# Altium PCB Quad FC V10.5.5.PcbDoc
Units mil, origin at the board's own origin, x right, y up, seen from the top; angles counter-clockwise.
Board outline 1771.65 x 1614.17 mil, 2 copper layers (Top Layer, Bottom Layer); 67 components, 51 nets, 286 pads, 114 vias.
Unrouted connection lines stored in the file: 67.
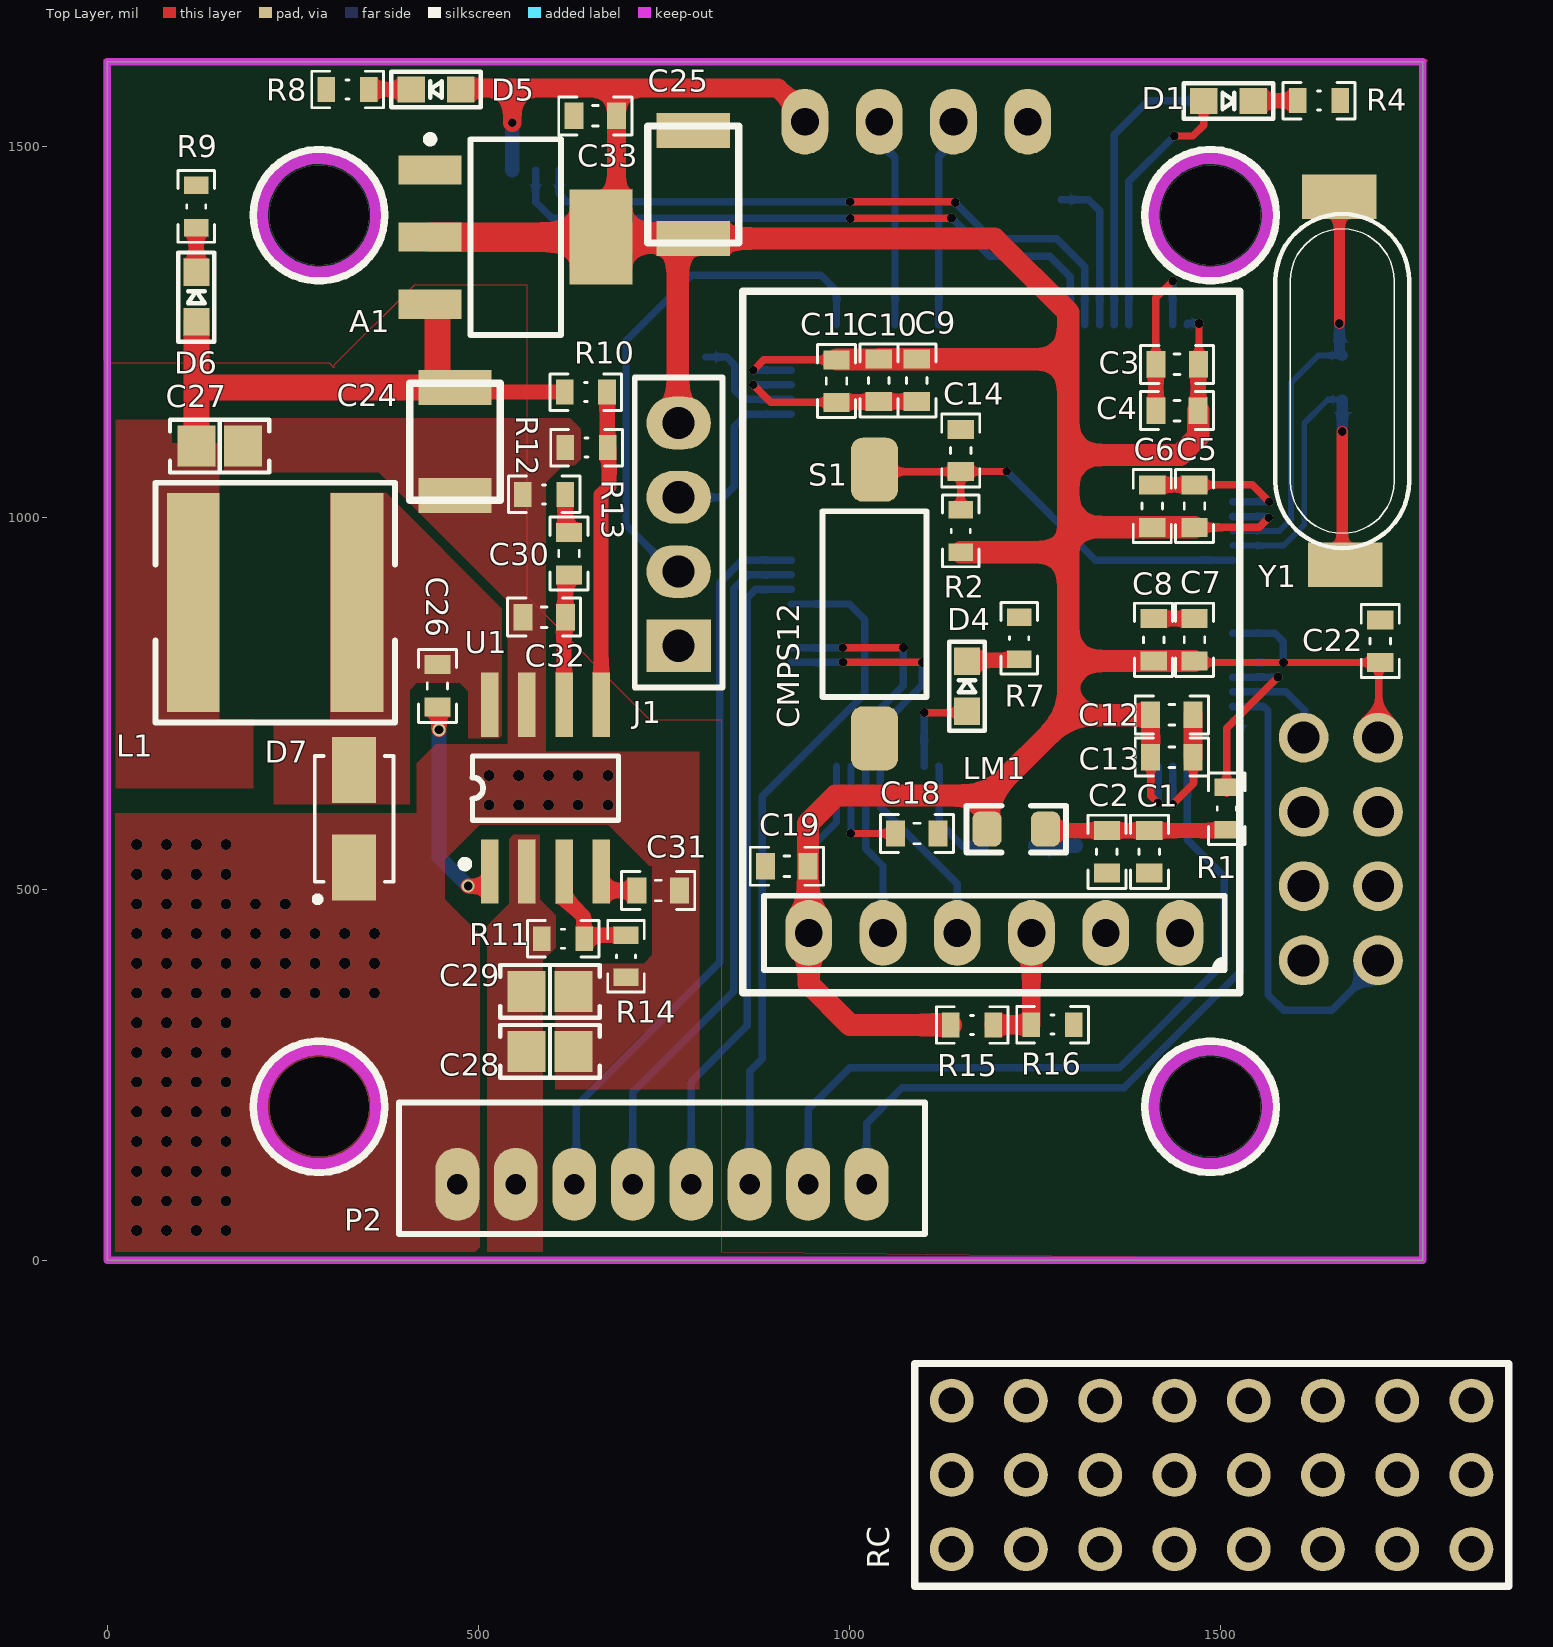
[diagram p0: Top Layer view]
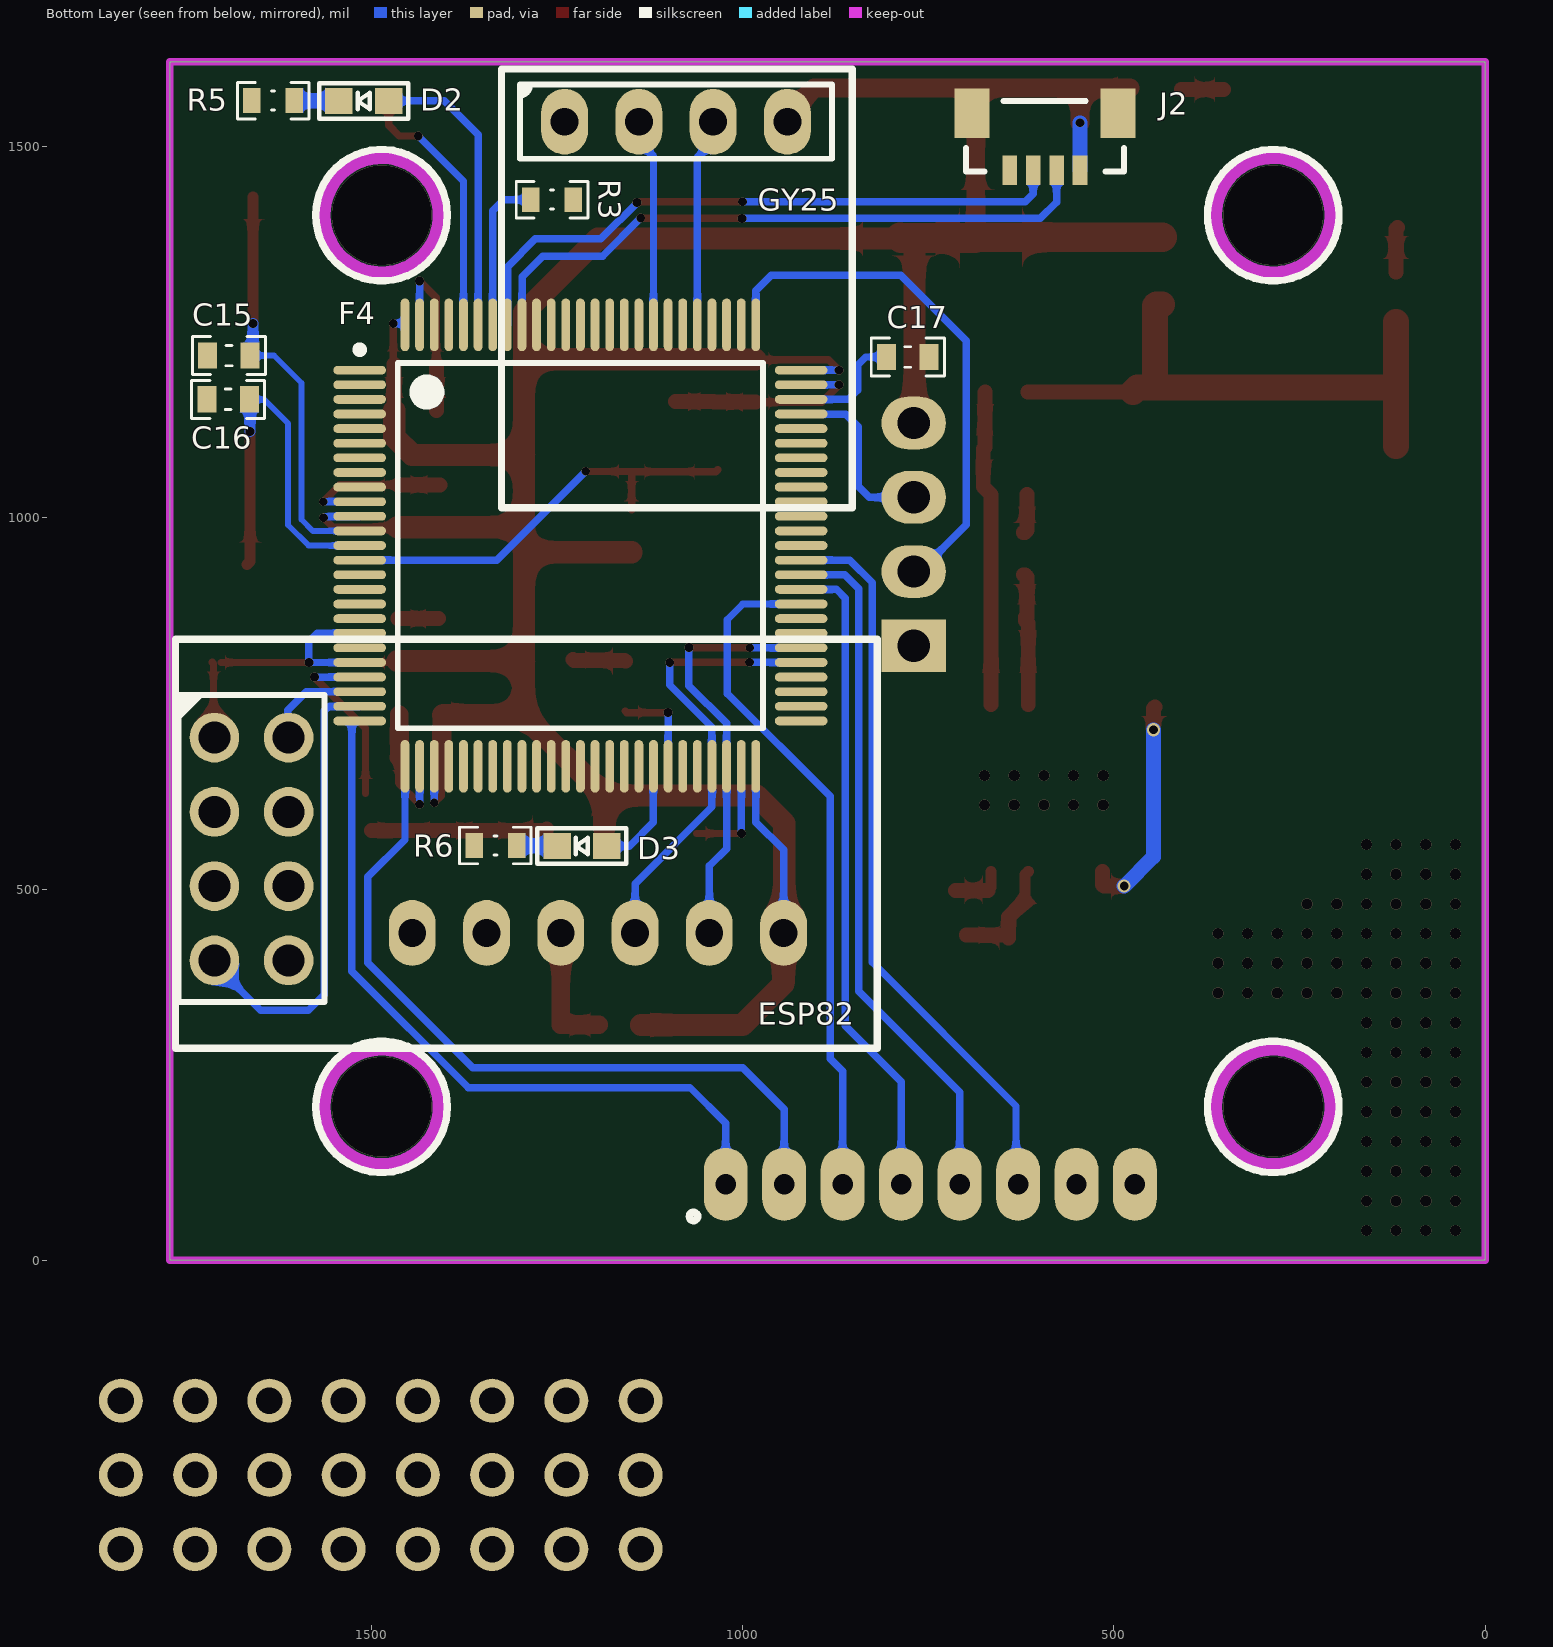
[diagram p1: Bottom Layer view, seen from below]
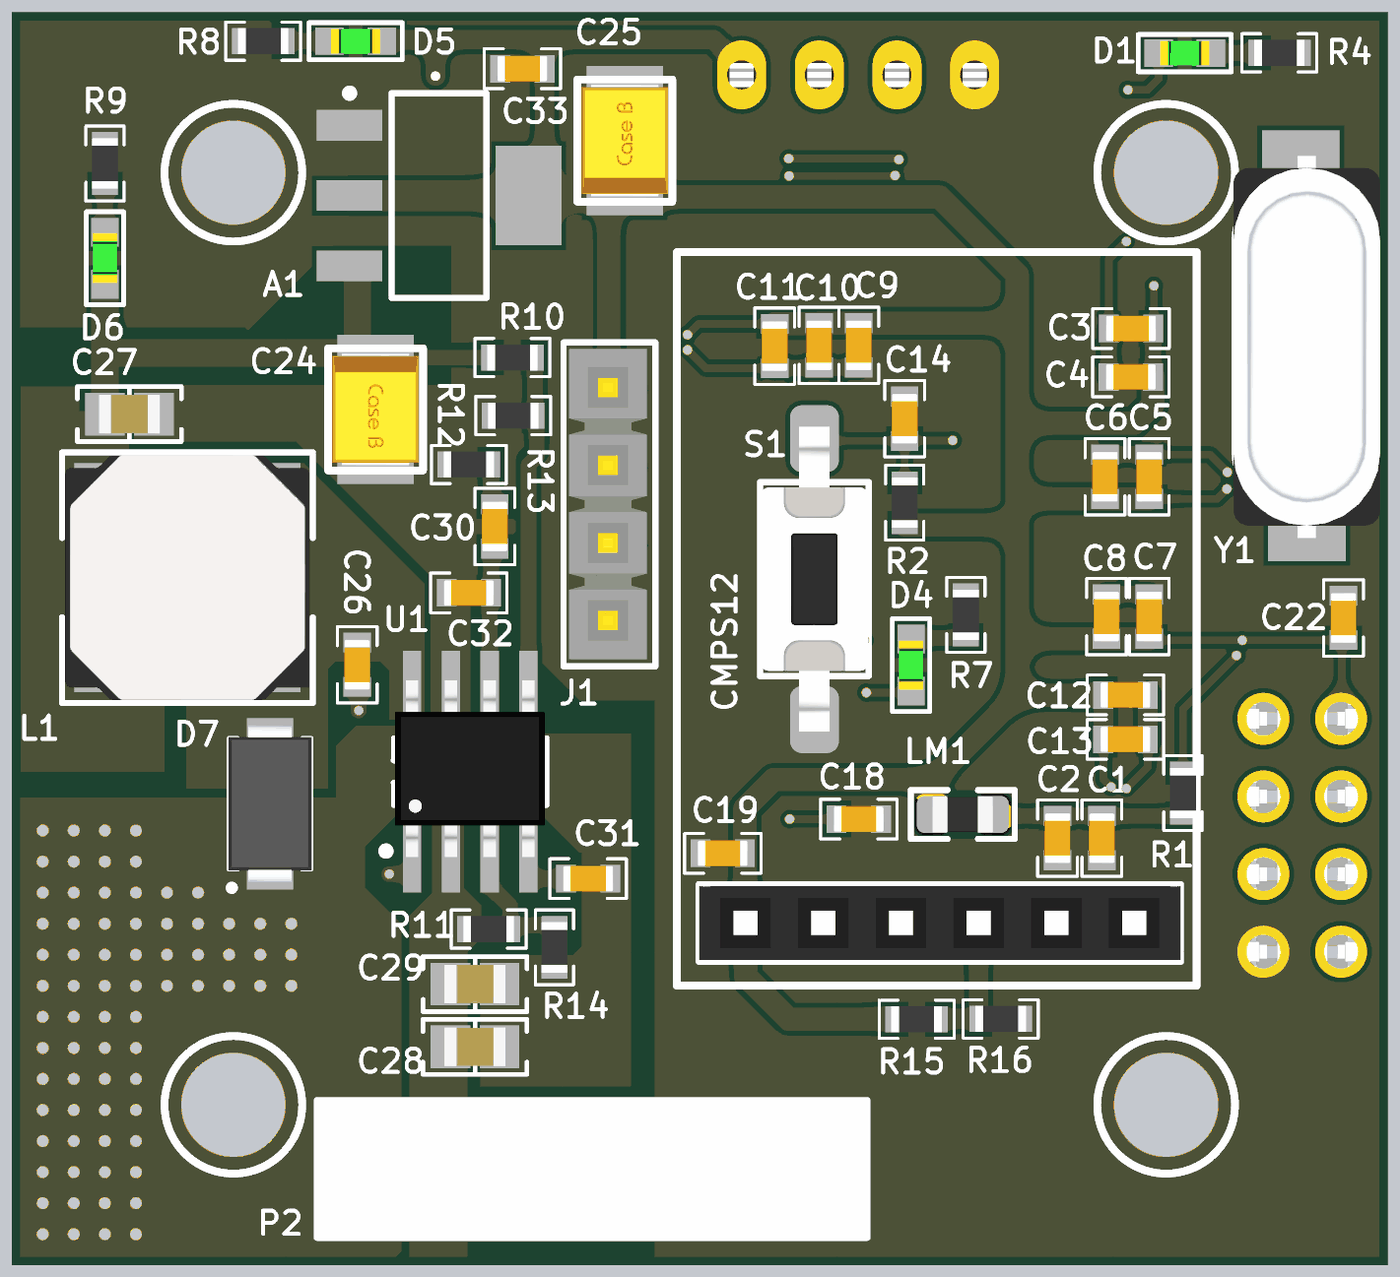
[diagram p2: 3D render of the assembled board from above, using the file's embedded part models]
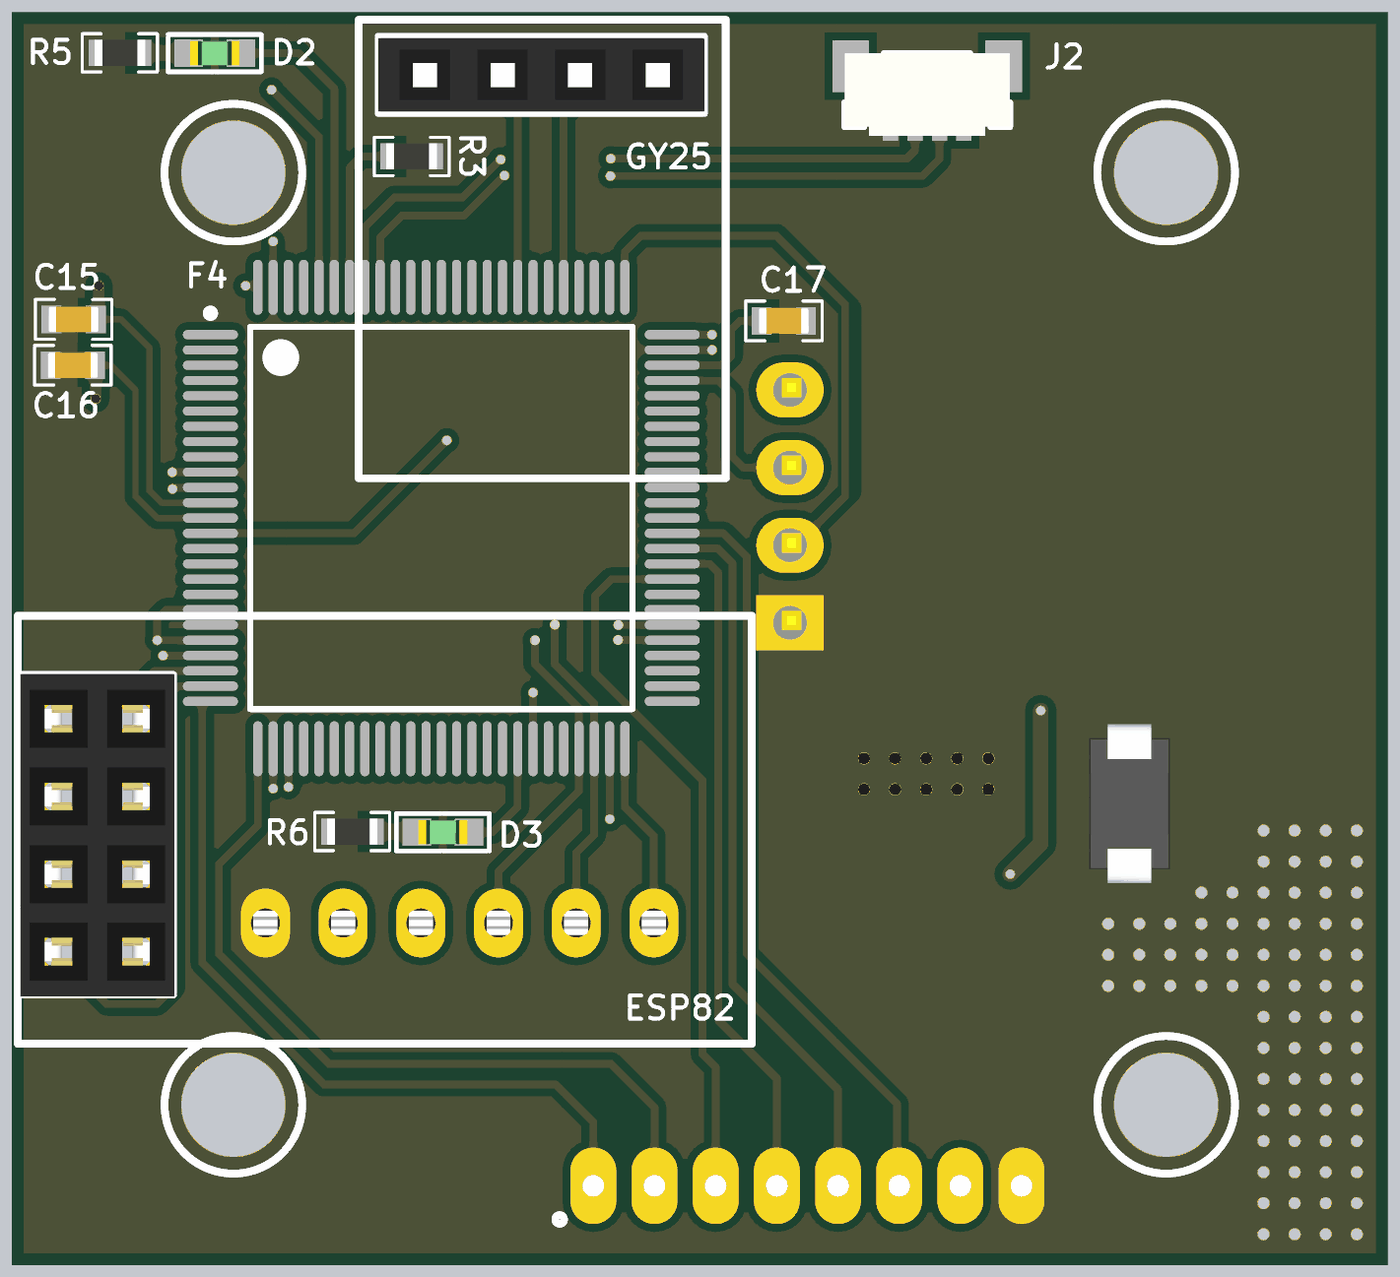
[diagram p3: 3D render of the assembled board from below, using the file's embedded part models]

## Layer stack, top to bottom
Top Solder: solder mask 0.4, Solder Resist, Dk 3.5
Top Layer: signal copper 1.4
Dielectric 1: dielectric 12.6, FR-4, Dk 4.8
Bottom Layer: signal copper 1.4
Bottom Solder: solder mask 0.4, Solder Resist, Dk 3.5

## Board outline
0,0 0,1614.17 1771.65,1614.17 1771.65,0

## Design rules (kind name [scope] priority, off if disabled: settings)
Clearance Clearance_2 [InNamedPolygon('NONET_L02_P005')] p1: gap=10 ignorepadtopadclearanceinfootprint=FALSE except(0: Arc-Hole Track-Hole SMDPad-Hole THPad-Hole Via-Hole Fill-Hole Poly-Hole Region-Hole Text-Hole)
Clearance Clearance_1 [InNamedPolygon('NONET_L02_P005')] p2: gap=20 ignorepadtopadclearanceinfootprint=FALSE except(0: Arc-Hole Track-Hole SMDPad-Hole THPad-Hole Via-Hole Fill-Hole Poly-Hole Region-Hole Text-Hole)
Clearance [All] p3: gap=6 ignorepadtopadclearanceinfootprint=FALSE except(0: Arc-Hole Track-Hole SMDPad-Hole THPad-Hole Via-Hole Fill-Hole Poly-Hole Region-Hole Text-Hole)
DiffPairsRouting [All] p1: maxlimit=10 minlimit=8 mostfreqgap=10 toplayer_minwidth=8 toplayer_maxwidth=15 toplayer_prefwidth=15 bottomlayer_minwidth=8 bottomlayer_maxwidth=15 bottomlayer_prefwidth=15 maxuncoupledlength=500
PolygonConnect PolygonConnect_8 [All vs IsNamedPolygon('NONET_L02_P005')] p1: connectstyle=Direct reliefconductorwidth=10 reliefentries=4 polygonreliefangle="90 Angle" airgapwidth=10
PolygonConnect PolygonConnect_7 [All vs IsNamedPolygon('NONET_L01_P004')] p2: connectstyle=Direct reliefconductorwidth=10 reliefentries=4 polygonreliefangle="90 Angle" airgapwidth=10
PolygonConnect PolygonConnect_6 [All vs IsNamedPolygon('NONET_L01_P004')] p3: connectstyle=Relief reliefconductorwidth=10 reliefentries=4 polygonreliefangle="90 Angle" airgapwidth=10
PolygonConnect PolygonConnect_5 [All vs IsNamedPolygon('NONET_L01_P004')] p4: connectstyle=Direct reliefconductorwidth=10 reliefentries=4 polygonreliefangle="90 Angle" airgapwidth=10
PolygonConnect PolygonConnect_4 [All vs IsNamedPolygon('12V_L01_P003')] p5: connectstyle=Direct reliefconductorwidth=10 reliefentries=4 polygonreliefangle="90 Angle" airgapwidth=10
PolygonConnect PolygonConnect_3 [All vs IsNamedPolygon('GND_L01_P002')] p6: connectstyle=Direct reliefconductorwidth=10 reliefentries=4 polygonreliefangle="90 Angle" airgapwidth=10
PolygonConnect PolygonConnect_2 [All vs IsNamedPolygon('NETC26_1_L01_P001')] p7: connectstyle=Direct reliefconductorwidth=10 reliefentries=4 polygonreliefangle="90 Angle" airgapwidth=10
PolygonConnect PolygonConnect_1 [All vs IsNamedPolygon('VBAT+_L01_P000')] p8: connectstyle=Direct reliefconductorwidth=10 reliefentries=4 polygonreliefangle="90 Angle" airgapwidth=10
PolygonConnect [All] p9: connectstyle=Relief reliefconductorwidth=10 reliefentries=4 polygonreliefangle="90 Angle" airgapwidth=10
RoutingVias [All] p1: holewidth=11.81 width=17.72 viastyle="Through Hole" minholewidth=11.81 minwidth=7.87 maxholewidth=196.85 maxwidth=196.85
SilkToSilkClearance [All] p1: silktosilkclearance=6
SolderMaskExpansion [Isvia] p1: expansion=2 istentingtop=TRUE
Width GND [All] p1: maxlimit=40 minlimit=10 preferedwidth=20
Width 3.3V [InNet('3V3')] p2: maxlimit=40 minlimit=10 preferedwidth=20
Width 12V [InNet('12V')] p3: maxlimit=40 minlimit=10 preferedwidth=20
Width [All] p4: maxlimit=20 minlimit=10 preferedwidth=15 minimp=50.000000 maximp=50.000000 favimp=50.000000
28 further rules are at their usual default settings.

## Classes and differential pairs
component class "Quad FC V10.5": C1 C2 C3 C4 C5 C6 C7 C8 C9 C10 C11 C12 C13 C14 C15 C16 C17 C18 C19 C22 C33 CMPS12 D1 D2 D3 D4 ESP82 F4 GY25 J1 J2 LM1 R1 R2 R3 R4 R5 R6 R7 R15 R16 RC S1 Y1
component class "Quad FC power V10.5": A1 C24 C25 C26 C27 C28 C29 C30 C31 C32 D5 D6 D7 L1 P2 R8 R9 R10 R11 R12 R13 R14 U1
differential pair F407_OSC: +F407_OSC_P -F407_OSC_N

## Components (designator, comment, footprint, x,y, rotation, side; value= is the part's Value field where it differs from the comment)
A1 "3.3V linear regulator" SOT230P700X180-4N 550.2,1377.95 r0 top
C1 "100nF" CAP0603 1403.54,550.2 r90 top
C2 "1uF" CAP0603 1346.46,550.2 r90 top
C3 "100nF" CAP0603 1440.94,1206.69 r0 top
C4 "100nF" CAP0603 1440.79,1144.33 r0 top
C5 "100nF" CAP0603 1464.41,1015.75 r270 top
C6 "100nF" CAP0603 1407.48,1015.75 r270 top
C7 "100nF" CAP0603 1464.41,835.63 r90 top
C8 "1uF" CAP0603 1409.45,835.63 r90 top
C9 "100nF" CAP0603 1090.55,1185.04 r90 top
C10 "4.7uF" CAP0603 1039.37,1185.04 r90 top
C11 "100nF" CAP0603 982.28,1184.06 r90 top
C12 "100nF" CAP0603 1433.86,734.65 r180 top
C13 "100nF" CAP0603 1433.86,677.56 r180 top
C14 "100nF" CAP0603 1149.61,1090.55 r90 top
C15 "10pF" CAP0603 1691.93,1218.5 r180 bottom
C16 "10pF" CAP0603 1692.91,1159.45 r0 bottom
C17 "2.2uF" CAP0603 777.56,1216.54 r180 bottom
C18 "2.2uF" CAP0603 1090.55,574.8 r0 top
C19 "100nF" CAP0603 915.35,530.71 r180 top
C22 "100nF" CAP0603 1714.57,833.86 r90 top
C24 "10uF" MY_CAP_SMD-B 468.5,1102.55 r270 top value=3300u
C25 "100uF" MY_CAP_SMD-B 789.37,1448.82 r90 top value=3300u
C26 "100nF" CAP0603 444.88,773.62 r270 top
C27 "10 µF" "CAP 0805_2012" 151.57,1096.46 r180 top
C28 "10 µF" "CAP 0805_2012" 596.46,281.5 r180 top
C29 "10 µF" "CAP 0805_2012" 596.46,362.2 r180 top
C30 "1nF" CAP0603 622.05,951.77 r90 top
C31 "8.2nF" CAP0603 742.13,498.03 r0 top
C32 "10pF" CAP0603 588.58,866.14 r180 top
C33 "100nF" CAP0603 657.48,1541.34 r180 top
CMPS12 "CMPS12" "SAMTEC SSW-106-03-T-S" 1194.88,440.94 r180 top
D1 "LED" "0603 - LED" 1510.2,1561.42 r0 top
D2 "LED" "0603 - LED" 1510.24,1561.42 r0 bottom
D3 "LED" "0603 - LED" 1216.5,557.87 r0 bottom
D4 "LED" "0603 - LED" 1157.87,773.23 r90 top
D5 "LED" "0603 - LED" 442.91,1576.77 r180 top
D6 "LED" "0603 - LED" 120.08,1297.24 r90 top
D7 "1n5822" DIOM4226X244N 332.68,594.49 r90 top
ESP82 "ESP82" "HARWIN M20-7830445" 1661.42,553.94 r180 bottom
F4 "STM32F407VGT6" STM-LQFP100_N 1218.5,962.6 r180 bottom
GY25 "GY25" "SAMTEC SSW-104-03-T-S" 1089.76,1533.46 r180 bottom
J1 "Programming Pin" "HEADER 4X1" 769.68,827.56 r90 top
J2 "SM04B-SURS-TF(LF)(SN)" "JST SM04B-SURS-TF" 592.91,1506.3 r180 bottom
L1 "10 µH" "TAIYO YUDEN NRS8030" 226.38,885.83 r180 top
LM1 "10uH" 0805L 1224.41,580.71 r180 top value=FB805
P2 "Connector 8" "JST B8B-PH-K" 747.24,102.36 r180 top
R1 "0" RES0603 1507.87,608.27 r90 top
R2 "1K" RES0603 1149.61,982.28 r90 top
R3 "1K" RES0603 1256.69,1428.35 r180 bottom
R4 "1K" RES0603 1632.09,1561.81 r0 top
R5 "1K" RES0603 1632.28,1561.81 r0 bottom
R6 "1K" RES0603 1333.07,558.66 r0 bottom
R7 "1K" RES0603 1228.35,837.8 r90 top
R8 "1K" RES0603 323.82,1576.77 r180 top
R9 "1K" RES0603 120.08,1419.29 r90 top
R10 "10.2k" RES0603 644.68,1169.29 r180 top
R11 "0.732k" RES0603 614.17,433.07 r180 top
R12 "0.732k" RES0603 645.67,1094.49 r0 top
R13 "36.5K" RES0603 588.58,1031.5 r0 top value=36.5k
R14 "0.732k" RES0603 698.82,409.45 r90 top
R15 "0" RES0603 1164.96,316.93 r180 top
R16 "0" RES0603 1273.23,317.32 r180 top
RC "Radio Control" HEADER8X3 1837.4,-188.98 r180 top
S1 "FSMSMTR" "TE FSMSMTR" 1033.46,883.86 r0 top
U1 "TPS54331" SO8 590.35,635.98 r0 top
Y1 "CRYSTAL_SMD" "My_Crystal - SMD" 1663.39,1184.07 r90 top

## Footprints (in the part's own frame and the unit in brackets; to place one, negate y for a bottom-side part, rotate by r counter-clockwise, add the part's x,y. Pads: shape width x height; smd on the part's side, far side on the other; paste and mask are expansions set on the pad)
"0603 - LED" [mil]
  rect 37x35 smd: 1(-33.5,0) 2(33.5,0)
  silkscreen extent -60,-24 60,24, body extent -32,-16 32,16, height 43
0805L [mm] ",0805, 2012, 200X130"
  rrect50% 1x1.2 smd mask+0.075: 1(-1,0) 2(1,0)
  Top Layer pour cut-out: -0.5,0.8 0.5,0.8 0.5,-0.8 -0.5,-0.8
  silkscreen extent -1.7,-0.8 1.7,0.8, body extent -1,-0.6 1,0.6, height 0.95
CAP0603 [mm] "Chip Capacitor, 2-Leads, Body 1/60x0/80mm, IPC Medium Density DESIGNER:ABBAS BASEREH"
  rect 0.65x0.9 smd: 1(-0.725,0) 2(0.725,0)
  silkscreen extent -1.25,-0.65 1.25,0.65, body extent -0.82,-0.43 0.82,0.43, height 0.4
"CAP 0805_2012" [mm] "Chip Capacitor, 2-Leads, Body 2.00x1.20mm, IPC Medium Density"
  rect 1.3x1.4 smd: 1(-0.8,0) 2(0.8,0)
  silkscreen extent -1.7,-0.9 1.7,0.9, body extent -1,-0.64 1,0.64, height 1.26
DIOM4226X244N [mm]
  rect 2.26x1.51 smd: 1(-1.67,0) 2(1.67,0)
  silkscreen extent -2.85,-1.35 2.15,1.35, body extent -2.6,-1.36 2.6,1.36, height 1.19
"HARWIN M20-7830445" [mm] "2.54mm DIL PC TAIL PIN HEADER ASSEMBLY"
  round 1.7 hole 1.1: 1(-1.27,3.81) 2(-1.27,1.27) 3(-1.27,-1.27) 4(-1.27,-3.81) 5(1.27,-3.81) 6(1.27,-1.27) 7(1.27,1.27) 8(1.27,3.81)
  silkscreen extent -2.5,-5.23 2.5,5.27, body extent -2.52,-5.28 2.52,5.28, height 8.5
HEADER8X3 [mm]
  round 1.5 hole 0.9: 1(0,0) 2(2.54,0) 3(5.08,0) 4(7.62,0) 5(10.16,0) 6(12.7,0) 7(15.24,0) 8(17.78,0) 9(0,2.54) 10(2.54,2.54) 11(5.08,2.54) 12(7.62,2.54) 13(10.16,2.54) 14(12.7,2.54) 15(15.24,2.54) 16(17.78,2.54) 17(0,5.08) 18(2.54,5.08) 19(5.08,5.08) 20(7.62,5.08) 21(10.16,5.08) 22(12.7,5.08) 23(15.24,5.08) 24(17.78,5.08)
  silkscreen extent -1.27,-1.27 19.05,6.35
"HEADER 4X1" [mm]
  rect 1.8x2.2 hole 1.1: 1(0,0)
  oval 1.8x2.2 hole 1.1: 2(2.54,0) 3(5.08,0) 4(7.62,0)
  silkscreen extent -1.43,-1.5 9.18,1.5, body extent -1.19,-1.22 8.97,1.32, height 8.38
"JST B8B-PH-K" [mm]
  oval 1.5x2.5 hole 0.7: 1(-7,0) 2(-5,0) 3(-3,0) 4(-1,0) 5(1,0) 6(3,0) 7(5,0) 8(7,0)
  silkscreen extent -9,-2.8 9,1.7, body extent -8.95,-2.8 8.95,1.7, height 6
"JST SM04B-SURS-TF" [mm] "1.0mm pitch/Disconnectable Crimp style connector"
  rect 0.5x1 smd: 1(-1.2,-0.975) 2(-0.4,-0.975) 3(0.4,-0.975) 4(1.2,-0.975)
  rect 1.2x1.7 smd: M(-2.5,0.975) M(2.5,0.975)
  silkscreen extent -2.7,-1.02 2.7,1.4, body extent -2.7,-1.3 2.7,1.4, height 1.75
MY_CAP_SMD-B [mm] "3.1X4"
  rect 1.2x2.5 smd: +(-1.845,0) -(1.845,0)
  silkscreen extent -2,-1.55 2,1.55, body extent -1.85,-1.41 1.85,1.41, height 2.14
"My_Crystal - SMD" [mil]
  rect 60x100 smd: 1(-247.06,-3.93) 2(248.03,3.94)
  silkscreen extent -225,-90 225,90, body extent -247,-98 245,91, height 154
RES0603 [mm] "Chip Resistor, 2-Leads, Body 1/60x0/80mm, IPC Medium Density DESIGNER:ABBAS BASEREH"
  rect 0.6x0.85 smd: 1(-0.725,0) 2(0.725,0)
  silkscreen extent -1.22,-0.63 1.22,0.63, body extent -0.82,-0.43 0.82,0.43, height 0.4
"SAMTEC SSW-104-03-T-S" [mm]
  oval 1.6x2.25 hole 0.95: 1(-3.81,0) 2(-1.27,0) 3(1.27,0) 4(3.81,0)
  silkscreen extent -5.34,-1.27 5.34,1.27, body extent -5.33,-1.21 5.33,1.21, height 8.51
"SAMTEC SSW-106-03-T-S" [mm]
  oval 1.6x2.25 hole 0.95: 1(-6.35,0) 2(-3.81,0) 3(-1.27,0) 4(1.27,0) 5(3.81,0) 6(6.35,0)
  silkscreen extent -7.88,-1.27 7.88,1.27, body extent -7.87,-1.21 7.87,1.21, height 8.51
SO8 [mm]
  rect 0.6x2.2 smd: 1(-1.905,-2.854) 2(-0.635,-2.854) 3(0.635,-2.854) 4(1.905,-2.854) 5(1.905,2.854) 6(0.635,2.854) 7(-0.635,2.854) 8(-1.905,2.854)
  silkscreen extent -2.88,-2.72 2.5,1.1, body extent -2.46,-2.79 2.44,2.98, height 1.45
SOT230P700X180-4N [mm] "SOT223, 4-Leads, Body 6.50x7.00mm (avg), Pitch 2.30mm, IPC Medium Density"
  rect 2.15x1 smd: 1(-2.925,2.3) 2(-2.925,0) 3(-2.925,-2.3)
  rect 2.15x3.25 smd: 4(2.925,0)
  silkscreen extent -3.05,-3.35 1.55,3.47, body extent -1.85,-3.35 1.85,3.35, height 1.8
STM-LQFP100_N [mm] "Thin QFP, 100-Leads, Body 14x14mm, Pitch 0.5mm, IPC Medium Density"
  oval 1.8x0.3 smd: 1(-7.55,6) 2(-7.55,5.5) 3(-7.55,5) 4(-7.55,4.5) 5(-7.55,4) 6(-7.55,3.5) 7(-7.55,3) 8(-7.55,2.5) 9(-7.55,2) 10(-7.55,1.5) 11(-7.55,1) 12(-7.55,0.5) 13(-7.55,0) 14(-7.55,-0.5) 15(-7.55,-1) 16(-7.55,-1.5) 17(-7.55,-2) 18(-7.55,-2.5) 19(-7.55,-3) 20(-7.55,-3.5) 21(-7.55,-4) 22(-7.55,-4.5) 23(-7.55,-5) 24(-7.55,-5.5) 25(-7.55,-6) 51(7.55,-6) 52(7.55,-5.5) 53(7.55,-5) 54(7.55,-4.5) 55(7.55,-4) 56(7.55,-3.5) 57(7.55,-3) 58(7.55,-2.5) 59(7.55,-2) 60(7.55,-1.5) 61(7.55,-1) 62(7.55,-0.5) 63(7.55,0) 64(7.55,0.5) 65(7.55,1) 66(7.55,1.5) 67(7.55,2) 68(7.55,2.5) 69(7.55,3) 70(7.55,3.5) 71(7.55,4) 72(7.55,4.5) 73(7.55,5) 74(7.55,5.5) 75(7.55,6)
  oval 0.3x1.8 smd: 26(-6,-7.55) 27(-5.5,-7.55) 28(-5,-7.55) 29(-4.5,-7.55) 30(-4,-7.55) 31(-3.5,-7.55) 32(-3,-7.55) 33(-2.5,-7.55) 34(-2,-7.55) 35(-1.5,-7.55) 36(-1,-7.55) 37(-0.5,-7.55) 38(0,-7.55) 39(0.5,-7.55) 40(1,-7.55) 41(1.5,-7.55) 42(2,-7.55) 43(2.5,-7.55) 44(3,-7.55) 45(3.5,-7.55) 46(4,-7.55) 47(4.5,-7.55) 48(5,-7.55) 49(5.5,-7.55) 50(6,-7.55) 76(6,7.55) 77(5.5,7.55) 78(5,7.55) 79(4.5,7.55) 80(4,7.55) 81(3.5,7.55) 82(3,7.55) 83(2.5,7.55) 84(2,7.55) 85(1.5,7.55) 86(1,7.55) 87(0.5,7.55) 88(0,7.55) 89(-0.5,7.55) 90(-1,7.55) 91(-1.5,7.55) 92(-2,7.55) 93(-2.5,7.55) 94(-3,7.55) 95(-3.5,7.55) 96(-4,7.55) 97(-4.5,7.55) 98(-5,7.55) 99(-5.5,7.55) 100(-6,7.55)
  silkscreen extent -7.68,-6.25 6.25,6.82, body extent -7,-7 7,7, height 1.6
"TAIYO YUDEN NRS8030" [mm] "Precision Wire Wound Inductor, 2-Leads, Body 8.00x8.00mm, IPC Medium Density"
  rect 1.8x7.5 smd: 1(-2.8,0) 2(2.8,0)
  silkscreen extent -4.1,-4.1 4.1,4.1, body extent -4,-4 4,4, height 3
"TE FSMSMTR" [mm]
  rrect50% 1.6x2.19 smd: 1(0,4.595) 2(0,-4.595)
  silkscreen extent -1.78,-3.17 1.78,3.17, body extent -1.75,-4.98 1.75,4.98, height 4.42

## Part data
A1: library part ams1117
C1 C2 C3 C4 C5 C6 C7 C8 C9 C10 C11 C12 C13 C14 C15 C16 C17 C18 C19 C22 C26 C30 C31 C32 C33: library part "CAP SMD PACKAGE", "F407VET6 Power CAP", Data=2017-3-10, Desc.="CAP SMD TOTAL PACKAGES", Designer="Abbas Basereh"
C24 C25: library part CAP_TANTAL_B, "3.5X2.8MM"
C27 C28 C29: library part GRM21BR61H106KE43K, "CAP CER 10UF 50V X5R 0805", Device Package="0805 (2012 Metric)", Manufacturer="Murata Electronics", Operating Temperature="-55°C ~ 85°C", Supplier Part Number 1=490-GRM21BR61H106KE43KCT-ND, Temperature Coefficient=X5R, Tolerance=±10%, Voltage - Rated=50V, Applications="General Purpose", Capacitance="10 µF", ComponentLink1Description=Datasheet, ComponentLink1URL=https://search.murata.co.jp/Ceramy/image/img/A01X/G101/ENG/GRM21BR61H106KE43-01A.pdf, ComponentLink2Description="DigiKey Link", ComponentLink2URL=https://www.digikey.com/en/products/detail/murata-electronics/GRM21BR61H106KE43K/15191954, LastUpdated="2/9/2024 8:15:01 PM", Lifecycle Status=Active, Minimum Order=1, Mounting Type="Surface Mount, MLCC", Package / Case="0805 (2012 Metric)", Packaging=TapeAndReel, Part Number=GRM21BR61H106KE43K, Part Status=Active, partid=40508, Price=0.05, Series=GRM, Size / Dimension="0.079\" L x 0.049\" W (2.00mm x 1.25mm)", Supplier 1=DigiKey, Thickness (Max)="0.057\" (1.45mm)"
CMPS12: library part SSW-106-03-T-S, "CONN RCPT 6POS 0.1 TIN PCB", Current Rating (Amps)="5.7A per Contact", Insulation Color=Black, Manufacturer="Samtec Inc.", Material Flammability Rating="UL94 V-0", Operating Temperature="-55°C ~ 105°C", Supplier Part Number 1=SAM8865-ND, ComponentLink1Description=Datasheet, ComponentLink1URL=http://suddendocs.samtec.com/prints/ssw-s.pdf, ComponentLink2Description="DigiKey Link", ComponentLink2URL=https://www.digikey.com/en/products/detail/samtec-inc/SSW-106-03-T-S/1790202, Connector Type=Receptacle, Contact Finish - Mating=Tin, Contact Finish - Post=Tin, Contact Length - Post="0.394\" (10.00mm)", Contact Type=Forked, Fastening Type=Push-Pull, Insulation Height="0.335\" (8.51mm)", LastUpdated="6/21/2022 3:09:22 PM", Lifecycle Status=Active, Minimum Order=1, Mounting Type="Through Hole", Number of Positions=6, Number of Positions Loaded=All, Number of Rows=1, Packaging=Bulk, Part Number=SSW-106-03-T-S, Part Status=Active, Pitch - Mating="0.100\" (2.54mm)", Price=0.55, Series=SSW, Style="Board to Board or Cable", Supplier 1=DigiKey, Termination=Solder
D1 D2 D3 D4 D5 D6: "Led", LatestRevisionDate=08-Jul-2005, LatestRevisionNote="Mech Layer 1 removed.", PackageReference=LED-0, Published=8-Jun-2000, Publisher="Altium Limited"
D7: library part "1n5822 SMD", "Schottky Rectifiers", Manufacturer="ON Semiconductor/Fairchild", Data=16-12-2016, Designer="Abbas Basereh", Link=https://www.aliexpress.com/item/Free-shipping-100pcs-1n5822-sma-smd-do-214ac-Schottky-diode-ss34/32337482329.html?spm=2114.01010208.3.1.zLZDsP&ws_ab_test=searchweb0_0,searchweb201602_4_10065_10068_10084_10083_10080_10082_10081_10060_10061_10062_10056_10055_10054_10059_10099_10078_10079_427_10073_10103_10102_10096_10052_10050_10051,searchweb201603_4&btsid=6e50dc92-ac69-45bc-a19e-209af19ce602, Part. No=SS34
ESP82: library part M20-7830442, "CONN RCPT 8POS 0.1 GOLD PCB", Current Rating (Amps)=3A, Insulation Color=Black, Manufacturer="Harwin Inc.", Material Flammability Rating="UL94 V-0", Operating Temperature="-40°C ~ 105°C", Supplier Part Number 1=952-1789-ND, ComponentLink1Description=Datasheet, ComponentLink1URL=https://cdn.harwin.com/pdfs/C001XX_M20_Series_Connectors.pdf, ComponentLink2Description="DigiKey Link", ComponentLink2URL=http://digikey.com/product-detail/en/harwin-inc/M20-7830442/952-1789-ND/3727758, Connector Type=Receptacle, Contact Finish - Mating=Gold, Contact Finish - Post=Tin, Contact Finish Thickness - Mating=Flash, Contact Length - Post="0.118\" (3.00mm)", Contact Type="Female Socket", Fastening Type=Push-Pull, Insulation Height="0.335\" (8.51mm)", LastUpdated="9/21/2022 7:04:26 PM", Lifecycle Status=Active, Mated Stacking Heights="11.04mm, 12.63mm", Minimum Order=1, Mounting Type="Through Hole", Number of Positions=8, Number of Positions Loaded=All, Number of Rows=2, Packaging=Tube, Part Number=M20-7830442, Part Status=Active, Pitch - Mating="0.100\" (2.54mm)", Price=1.36, Row Spacing - Mating="0.100\" (2.54mm)", Series=M20, Style="Board to Board or Cable", Supplier 1=DigiKey, Termination=Solder
F4: "ARM Cortex-M4 32-bit MCU+FPU, 210 DMIPS, 1024 kB Flash, 192 kB Internal RAM, 82 I/Os, 100-pin LQFP, -40 to 85 degC, Tray", I/Os (High Current)=82, Manufacturer=STMicroelectronics, Operating Frequency(F) (Processor speed) (MHz)=168, Supplier Part Number 1=497-11605-ND, Supply Voltage(Vcc) max (V)=3.6, Supply Voltage(Vcc) min (V)=1.8, ComponentLink1Description="Manufacturer URL", ComponentLink1URL=http://www.st.com/web/en/home.html, ComponentLink2Description=Datasheet, ComponentLink2URL=http://www.st.com/st-web-ui/static/active/en/resource/technical/document/datasheet/DM00037051.pdf, ComponentLink3Description="Package Specification", ComponentLink3URL=http://www.st.com/st-web-ui/static/active/en/resource/technical/document/data_brief/DM00071938.pdf, Core="ARM Cortex-M4", D/A Converter=2x12-bit, DatasheetVersion="Rev. 4", FLASH Size (Prog) (kB)=1024, Internal RAM Size (kB)=192, Mounting Technology="Surface Mount", PackageDescription="100-Pin Low Profile Quad Flat Package, 14 x 14 mm Body, 0.5 mm Pitch", PackageReference=LQFP100, PackageVersion="Rev. 1, 06/2013", Packing=Tray, PartNumber=STM32F407VGT6, Supplier 1=Digi-Key, Supplier 2=Farnell, Supplier 3=Newark, Supplier 4=Mouser, Supplier Part Number 2=2064368, Supplier Part Number 3=73T2333, Supplier Part Number 4=511-STM32F407VGT6
GY25: library part SSW-104-03-T-S, "CONN RCPT 4POS 0.1 TIN PCB", Current Rating (Amps)="5.7A per Contact", Insulation Color=Black, Manufacturer="Samtec Inc.", Material Flammability Rating="UL94 V-0", Operating Temperature="-55°C ~ 105°C", Supplier Part Number 1=SSW-104-03-T-S-ND, ComponentLink2Description="DigiKey Link", ComponentLink2URL=http://digikey.com/product-detail/en/samtec-inc/SSW-104-03-T-S/SSW-104-03-T-S-ND/7874034, Connector Type=Receptacle, Contact Finish - Mating=Tin, Contact Finish - Post=Tin, Contact Type=Forked, Fastening Type=Push-Pull, LastUpdated="6/21/2022 3:08:52 PM", Lifecycle Status=Active, Minimum Order=1, Mounting Type="Through Hole", Number of Positions=4, Number of Positions Loaded=All, Number of Rows=1, Packaging=Bulk, Part Number=SSW-104-03-T-S, Part Status=Active, Price=0.83, Series=SSW, Style="Board to Board or Cable", Supplier 1=DigiKey, Termination=Solder
J1: library part Header4X1
J2: "CONN HEADER SMD R/A 4POS 0.8MM", Part Number=SM04B-SURS-TF(LF)(SN)
L1: library part NRS8030T100MJGJV, "FIXED IND 10UH 3A 42.9 MOHM SMD", Current - Saturation=2.4A, Current Rating (Amps)="3 A", DC Resistance (DCR)="42.9mOhm Max", Device Package=Nonstandard, Frequency - Self Resonant=27MHz, Inductance Frequency - Test="100 kHz", Manufacturer="Taiyo Yuden", Operating Temperature="-40°C ~ 125°C", Ratings=AEC-Q200, Supplier Part Number 1=587-3647-1-ND, Tolerance=±20%, ComponentLink1Description=Datasheet, ComponentLink1URL="https://ds.yuden.co.jp/TYCOMPAS/ut/detail?pn=NRS8030T100MJGJV  &u=M", ComponentLink2Description="DigiKey Link", ComponentLink2URL=https://www.digikey.com/en/products/detail/taiyo-yuden/NRS8030T100MJGJV/4693986, Height - Seated (Max)="0.118\" (3.00mm)", Inductance="10 µH", LastUpdated="2/8/2024 9:55:48 PM", Lifecycle Status=Active, Material - Core=Ferrite, Minimum Order=1, Mounting Type="Surface Mount", Package / Case=Nonstandard, Packaging=TapeAndReel, Part Number=NRS8030T100MJGJV, Part Status=Active, partid=5482, Price=0.23, Series="NR, S Type", Shielding=Shielded, Size / Dimension="0.315\" L x 0.315\" W (8.00mm x 8.00mm)", Supplier 1=DigiKey, Type="Drum Core, Wirewound"
LM1: library part "L SMA 0.25W", "Inductor", Code_IEC=1005, Code_JEITA=0402, LatestRevisionDate=29-May-2009, LatestRevisionNote="IPC-7351 Footprint Added.", PackageDescription="Chip Inductor", PackageReference=0402-A, Published=8-Jun-2000, Publisher="Altium Limited"
P2: library part Connector1x8, "Connector, 8-Pin2.5mm", LatestRevisionDate=17-Jul-2002, LatestRevisionNote="Re-released for DXP Platform.", Publisher="Altium Limited"
R1 R2 R3 R4 R5 R6 R7 R8 R9 R10 R11 R12 R13 R14 R15 R16: library part "RES SMD PACKAGE", "TOTAL SMD RESISTOR PACK", Data=2017-3-10, Desc.="RES SMD PAKAGES", Designer="Abbas Basereh"
RC: library part MHDR_2X12, "Male Header 2X12"
S1: "SWITCH TACTILE SPST-NO 0.05A 24V", Contact Rating @ Voltage="0.05A @ 24VDC", Manufacturer="TE Connectivity ALCOSWITCH Switches", Operating Force=180gf, Operating Temperature="-35°C ~ 85°C", Supplier Part Number 1=450-1758-1-ND, Actuator Height off PCB, Vertical=4.57mm, Actuator Orientation="Top Actuated", Actuator Type=Standard, Circuit=SPST-NO, ComponentLink1Description=Datasheet, ComponentLink1URL=https://www.te.com/commerce/DocumentDelivery/DDEController?Action=srchrtrv&DocNm=1437566-3&DocType=Customer+Drawing&DocLang=English, ComponentLink2Description="DigiKey Link", ComponentLink2URL=https://www.digikey.com/en/products/detail/te-connectivity-alcoswitch-switches/FSMSMTR/529671, Illumination=Non-Illuminated, LastUpdated="2/8/2024 9:49:52 PM", Lifecycle Status=Active, Minimum Order=1, Mounting Type="Surface Mount", Outline="6.00mm x 3.50mm", Packaging=TapeAndReel, Part Number=FSMSMTR, Part Status=Active, Price=0.20, Series=FSMSM, Supplier 1=DigiKey, Switch Function=Off-Mom, Termination Style="Gull Wing"
U1: "DC/DC Switching Regulators 2A,28V,1MHz Step Down SWIFT DC/D;Output Voltage:0.8 V to 25 V", Link=http://javanelec.com/productsDetails.aspx?id=33786
Y1: "Crystal"

## Via types
v1: diameter 15, hole 15, Top Layer to Bottom Layer, tented both sides, 83 vias
v2: diameter 11.81, hole 11.81, Top Layer to Bottom Layer, tented both sides, 25 vias
v3: diameter 133.86, hole 133.86, Top Layer to Bottom Layer, tented both sides, 4 vias
v4: diameter 17.72, hole 11.81, Top Layer to Bottom Layer, tented both sides, 2 vias

## Nets (pads, with @x,y where several pads share a name; then routed paths per layer and width w, separated by ;. In a path a pad name is that pad's centre, name@x,y a point inside that pad or via, vN(x,y) a via of type N, cw(c..) or ccw(c..) an arc to the next point about the centre after c; other vN are vias at no path point)
3V3: A1.2 A1.4 C3.2 C4.2 C5.2 C6.2 C7.1 C8.1 C9.2 C10.2 C11.2 C12.2 C13.2 C19.1 C22.1 C25.+ C33.1 CMPS12.6 D5.1 ESP82.1 F4.11 F4.19 F4.21 F4.28 F4.50 F4.75 F4.100 GY25.4 J1.4 J2.4 LM1.2 R2.1 R15.2 RC.9 | length 5911.9
  Top Layer w10: v2(870.08,1198.82) 870.57,1198.82 884.35,1212.6 C11.2 ; C13.2@1405.71,680.32 1405.71,625.79 v2@1415.01,616.49 ; C7.1 1466.38,805.12 v2@1583.67,805.12 ; C5.2 1551.68,987.2 v2(1564.47,1000) ; C3.2 1470.47,1207.68 v2(1470.47,1261.81) ; v2(1584.16,805.12) C22.1@1702.36,805.12 ; ESP82.1@1712.6,696.06 1712.6,803.35 C22.1
  Top Layer w20: D5.1 D5.1@478.38,1578.74 ; GY25.4 GY25.4@939.76,1542.52 ; CMPS12.6@943.9,441.93 CMPS12.6 ; C11.2 C11.2@982.78,1213.09 ; C10.2@1038.88,1213.09 C10.2 ; LM1.2 LM1.2@1186.22,581.89 ; C4.2 1469.41,1144.41 1469.41,1206.61 C3.2
  Top Layer w25: D5.1@478.38,1578.74 545.67,1578.74 ; v2(545.67,1531.89) 545.67,1578.74 ; A1.4@686.02,1374.02 C33.1 686.02,1578.74 ; GY25.4@939.76,1542.52 903.54,1578.74 686.02,1578.74 ; C12.2 1405.32,680.71 C13.2@1405.71,680.32 ; 545.67,1578.74 686.02,1578.74
  Top Layer w30: J1.4@768.62,1128.62 768.62,1367.55 777.24,1376.17 1194.69,1376.17 1294.49,1276.38 1294.49,1213.58 ; CMPS12.6@943.9,441.93 C19.1 943.9,588.39 981.35,625.84 1186.22,625.84 ; CMPS12.6 944.88,372.44 1000.39,316.93 R15.2 ; C11.2@982.78,1213.09 C10.2@1038.88,1213.09 ; C10.2 1091.06,1213.58 C9.2 1294.49,1213.58 ; R2.1@1149.8,953.54 1294.49,953.54 ; LM1.2@1186.22,581.89 1186.22,625.84 ; C12.2@1403.11,734.11 1294.49,734.11 ; C6.2@1407.28,987.4 1294.49,987.4 ; C6.2 C5.2 ; C7.1 C8.1 1294.49,807.09 ; C4.2 1469.33,1109.1 1444.88,1084.65 1294.49,1084.65 ; 1186.22,625.84 1294.49,734.11 ; 1294.49,734.11 1294.49,807.09 ; 1294.49,807.09 1294.49,953.54 ; 1294.49,953.54 1294.49,987.4 ; 1294.49,987.4 1294.49,1084.65 ; 1294.49,1084.65 1294.49,1213.58
  Top Layer w40: A1.2 686.02,1377.95 687.23,1376.75 786.38,1376.75 C25.+@787.59,1377.95
  Bottom Layer w10: v2(870.08,1198.82) F4.75 ; CMPS12.6 944.88,552.76 982.28,590.16 F4.50 ; v2(1415.35,616.14) F4.28 ; F4.100 1454.72,1260.97 1455.56,1261.81 v2(1470.47,1261.81) ; F4.21 v2(1584.16,805.12) 1584.16,833.17 1572.83,844.49 F4.19 ; F4.11 1516.09,1001.62 1562.85,1001.62 v2(1564.47,1000)
  Bottom Layer w20: J2.4 v2(545.67,1531.89)
12V: A1.3 C24.+ C27.2 D6.1 L1.2 R10.2 | length 789.1
  Top Layer w20: C24.+@474.41,1169.29 R10.2
  Top Layer w35: C27.2 120.08,1175.2 ; D6.1 120.08,1175.2 ; A1.3 442.7,1287.4 444.88,1285.22 444.88,1181.32 C24.+@451,1175.2 ; C24.+@474.41,1169.29 C24.+ C24.+@451,1175.2 ; 120.08,1175.2 C24.+@451,1175.2
CMPS12_RX_SCL: CMPS12.4 F4.47 F4.55 | length 607.6
  Top Layer w10: v2(990.94,805.51) 991.14,805.32 1097.83,805.32 v2(1098.03,805.12)
  Bottom Layer w10: F4.55 921.46,805.32 990.75,805.32 v2(990.94,805.51) ; v2(1098.03,805.12) 1098.03,774.8 1041.34,718.11 F4.47 1041.34,610.63 1144.88,507.09 CMPS12.4
CMPS12_TX_SDA: CMPS12.5 F4.48 F4.56 | length 566.3
  Top Layer w10: v2(990.55,824.8) 990.75,825 1072.24,825 v2(1072.44,825.2)
  Bottom Layer w10: F4.56 v2(990.55,824.8) ; CMPS12.5 1044.88,531.1 1021.65,554.33 F4.48 1021.65,723.23 1072.44,774.02 v2(1072.44,825.2)
"ESC Rx": F4.25 P2.1 | length 1017.8
  Bottom Layer w10: P2.1 1022.83,184.65 1070.87,232.68 1369.69,232.68 1526.38,389.37 1526.38,725.54 1525.54,726.38 F4.25
"ESC Tx": F4.26 P2.2 | length 1028.8
  Bottom Layer w10: P2.2 944.09,203.54 1000,259.45 1363.39,259.45 1504.72,400.79 1504.72,516.56 1454.72,566.56 F4.26
"ESP82 Rx": ESP82.8 F4.23 | length 151.9
  Bottom Layer w10: F4.23 1587.66,765.75 1612.6,740.81 ESP82.8@1612.6,696.06
"ESP82 Tx": ESP82.4 F4.24 | length 602
  Bottom Layer w10: F4.24 1516.09,745.72 1557.53,745.72 1563.39,739.86 1563.39,357.87 1584.65,336.61 1649.31,336.61 ESP82.4@1702.36,389.67
"F407 NRST": C14.1 F4.14 R2.2 S1.1 | length 584.4
  Top Layer w10: S1.1 1036.22,1062.01 C14.1 ; R2.2 C14.1 ; v2(1211.42,1062.6) 1211.12,1062.3 1149.9,1062.3 C14.1
  Bottom Layer w10: v2(1211.42,1062.6) 1331.1,942.91 F4.14
"F407 SWCLK": F4.76 J1.2 | length 726.8
  Bottom Layer w10: J1.2 761.81,927.56 698.82,990.55 698.82,1238.19 787.01,1326.38 961.42,1326.38 982.28,1305.51 F4.76 ; J1.2@799.21,921.65 J1.2@807.09,921.65
"F407 SWDIO": F4.72 J1.3 | length 245.1
  Bottom Layer w10: J1.3 829.53,1027.56 844.49,1042.52 844.49,1122.83 861.07,1139.42 920.91,1139.42 F4.72
F407_OSC_N: C16.1 F4.13 Y1.1 | length 535.8
  Top Layer w15: v2(1663.39,1116.14) 1663.39,940.94 Y1.1
  Bottom Layer w8: F4.13@1516.48,963.33 F4.13 1584.51,962.6 1612.2,990.29 1612.2,1127.17 1644.26,1159.22 1664.14,1159.22 C16.1 C16.1@1663.39,1158.46
  Bottom Layer w15: v2(1663.39,1116.14) C16.1@1663.39,1158.46
F407_OSC_P: C15.2 F4.12 Y1.2 | length 569.4
  Top Layer w15: v2(1659.45,1261.81) Y1.2@1659.45,1432.1
  Bottom Layer w8: F4.12@1516.48,981.55 F4.12 1578.74,982.28 1594.2,997.75 1594.2,1181.53 1631.18,1218.5 C15.2
  Bottom Layer w15: v2(1659.45,1261.81) 1659.45,1222.44 C15.2
GND: A1.1 C1.1 C2.1 C3.1 C4.1 C5.1 C6.1 C7.2 C8.2 C9.1 C10.1 C11.1 C12.1 C13.1 C14.2 C15.1 C16.2 C17.2 C18.2 C19.2 C22.2 C24.- C25.- C27.1 C28.1 C29.1 C31.2 C32.2 C33.2 CMPS12.1 D7.1 ESP82.5 F4.10 F4.20 F4.27 F4.74 F4.99 GY25.1 J1.1 J2.1 P2.8 R3.2 R4.2 R5.2 R6.2 R7.2 R8.2 R9.2 R12.1 R13.1 R14.1 R16.1 RC.17 RC.18 RC.19 RC.20 RC.21 RC.22 RC.23 RC.24 S1.2 U1.7 | length 979.3
  Top Layer w10: v2(870.08,1179.13) 893.7,1155.51 C11.1 ; C3.1 1412.4,1296.26 v2(1435.04,1318.9) ; v2(1435.04,614.17) 1462.8,641.93 C13.1@1462.8,677.56 ; C5.1 1542.32,1044.29 v2(1564.96,1021.65)
  Top Layer w20: C11.1 982.78,1156 1038.88,1156 C10.1 C9.1 ; C6.1 C5.1 ; C8.2 C7.2 ; C4.1 1412.32,1144.41 1412.32,1206.61 C3.1
  Top Layer w25: C12.1 1462.4,677.95 C13.1@1462.8,677.56
  Bottom Layer w10: v2(870.08,1179.13) F4.74 ; v2(1435.04,614.17) F4.27 ; F4.99 v2(1435.04,1318.9) ; F4.10 v2(1564.96,1021.65)
  other v1: 40,40 80,40 120,40 160,40 40,80 80,80 120,80 160,80 40,120 80,120 120,120 160,120 40,160 80,160 120,160 160,160 40,200 80,200 120,200 160,200 40,240 80,240 120,240 160,240 40,280 80,280 120,280 160,280 40,320 80,320 120,320 160,320 40,360 80,360 120,360 160,360 200,360 240,360 280,360 320,360 360,360 40,400 80,400 120,400 160,400 200,400 240,400 280,400 320,400 360,400 40,440 80,440 120,440 160,440 200,440 240,440 280,440 320,440 360,440 40,480 80,480 120,480 160,480 200,480 240,480 40,520 80,520 120,520 160,520 40,560 80,560 120,560 160,560 514.33,612.99 554.33,612.99 594.33,612.99 634.33,612.99 674.33,612.99 514.33,652.99 554.33,652.99 594.33,652.99 634.33,652.99 674.33,652.99
  other v3: 285.43,206.69 1486.22,206.69 285.43,1407.48 1486.22,1407.48
"GY25 Rx": F4.80 GY25.3 | length 282.4
  Bottom Layer w10: GY25.3 1039.76,1506.33 1061.02,1485.07 F4.80
"GY25 Tx": F4.83 GY25.2 | length 281.8
  Bottom Layer w10: F4.83 1120.08,1486.64 1139.76,1506.33 GY25.2
LED1: D1.1 F4.96 | length 358.1
  Top Layer w10: v2(1437.01,1514.17) 1462.2,1514.17 1476.7,1528.67 D1.1
  Bottom Layer w10: F4.96 1375.98,1453.15 v2(1437.01,1514.17)
LED2: D2.1 F4.95 | length 395.3
  Bottom Layer w10: F4.95 1356.3,1515.75 1401.97,1561.42 D2.1
LED3: D3.1 F4.43 | length 151.5
  Bottom Layer w10: F4.43 1120.43,665.01 1120.43,589.81 1152.36,557.87 D3.1
LED4: D4.1 F4.44 | length 130.2
  Top Layer w10: v2@1100.88,737.7 1155.84,737.7 D4.1
  Bottom Layer w10: F4.44 v2(1100.39,737.7)
NetC1_2: C1.2 C2.2 LM1.1 R1.1 | length 237
  Top Layer w20: LM1.1 1265.75,578.74 C2.2 R1.1@1500,578.74
NetC17_1: C17.1 F4.73 | length 158.6
  Bottom Layer w10: C17.1 834.25,1216.54 845.28,1205.51 845.28,1171.65 857.48,1159.45 F4.73
NetC18_1: C18.1 F4.49 | length 151.1
  Top Layer w10: v2(1001.57,574.8) C18.1
  Bottom Layer w10: v2(1001.57,574.8) 1001.77,575 1001.77,665.16 F4.49
NetC26_1: C26.1 D7.2 L1.1 U1.8
NetC26_2: C26.2 U1.1 | length 306
  Top Layer w20: C26.2 446.85,743.11 v4(446.85,714.57) ; v4(486.22,503.94) 513.54,503.94 515.35,505.75 U1.1
  Bottom Layer w20: v4(446.85,714.57) 446.85,543.31 v4(486.22,503.94)
NetC30_1: C30.1 C32.1 U1.6 | length 179.7
  Top Layer w20: U1.6 615.35,857.48 619.09,861.22 C32.1@619.09,866.14 ; C32.1 617.13,920.43 619.92,923.23 C30.1
NetC30_2: C30.2 R13.2 | length 54.5
  Top Layer w20: R13.2 617.13,983.11 619.92,980.31 C30.2
NetC31_1: C31.1 U1.4 | length 71.3
  Top Layer w15: U1.4 665.35,502.34 U1.4@669.67,498.03
  Top Layer w20: U1.4@669.67,498.03 C31.1
NetCMPS12_3: CMPS12.3 R15.1 R16.2 | length 174.9
  Top Layer w10: R15.1 R15.1@1193.9,317.32 ; CMPS12.3@1244.78,440.85 CMPS12.3
  Top Layer w25: R15.1@1193.9,317.32 R16.2 CMPS12.3@1244.68,440.75
NetD1_2: D1.2 R4.1 | length 60
  Top Layer w20: D1.2 1543.9,1561.61 1603.35,1561.61 R4.1
NetD2_2: D2.2 R5.1 | length 60.2
  Bottom Layer w20: D2.2 1543.93,1561.61 1603.54,1561.61 R5.1
NetD3_2: D3.2 R6.1 | length 54.9
  Bottom Layer w20: D3.2 1250.39,558.27 1304.13,558.27 R6.1
NetD4_2: D4.2 R7.1 | length 71.5
  Top Layer w20: D4.2 1159.14,807.99 1227.08,807.99 R7.1
NetD5_2: D5.2 R8.1 | length 57.1
  Top Layer w20: R8.1 D5.2
NetD6_2: D6.2 R9.1 | length 60.9
  Top Layer w20: R9.1@118.11,1390.75 118.27,1390.75 120.08,1388.94 D6.2
NetF4_22: F4.22 R1.2 | length 246.1
  Top Layer w10: R1.2@1507.87,628.94 1507.87,716.54 v2(1576.77,785.43)
  Bottom Layer w10: F4.22 v2(1576.77,785.43)
NetF4_94: F4.94 R3.1 | length 211.1
  Bottom Layer w10: R3.1 1321.65,1428.35 1336.61,1413.39 F4.94
NetR10_1: R10.1 R12.2 U1.5 | length 426.5
  Top Layer w20: U1.5 665.35,1031.1 676.02,1041.77 676.02,1092.68 673.72,1094.98 673.72,1168.8 R10.1
NetR11_1: R11.1 R14.2 U1.3 | length 160.4
  Top Layer w15: U1.3 619.67,519.31 U1.3@619.67,484.67 ; R11.1@641.81,433.98 R11.1 642.72,433.68 R11.1@647.03,437.99
  Top Layer w20: U1.3@619.67,484.67 641.81,462.52 R11.1@641.81,433.98 ; R11.1@647.03,437.99 R14.2
"PWM MOTOR 1": F4.59 P2.3 | length 932.7
  Bottom Layer w10: P2.3 865.35,254.72 882.28,271.65 882.28,624.8 1020.47,762.99 1020.47,862.99 999.61,883.86 F4.59
"PWM MOTOR 2": F4.60 P2.4 | length 884.9
  Bottom Layer w10: P2.4 786.61,240.55 861.81,315.75 861.81,891.73 873.62,903.54 F4.60
"PWM MOTOR 3": F4.61 P2.5 | length 943.6
  Bottom Layer w10: P2.5 707.87,226.38 843.7,362.2 843.7,904.33 862.6,923.23 F4.61
"PWM MOTOR 4": F4.62 P2.6 | length 1014.7
  Bottom Layer w10: P2.6@631.89,86.61 631.89,207.87 825.2,401.18 825.2,912.6 855.51,942.91 F4.62
"RC PWM INPUT 1": F4.30 RC.1
"RC PWM INPUT 2": F4.31 RC.2
"RC PWM INPUT 3": F4.32 RC.3
"RC PWM INPUT 4": F4.35 RC.4
"RC PWM INPUT 5": F4.36 RC.5
VBAT+: C28.2 C29.2 P2.7 R11.2 U1.2
VL53_SCL: F4.92 J2.3 | length 869
  Top Layer w10: v2(1000.79,1403.15) 1136.12,1403.15 1136.42,1403.45 v2@1136.67,1403.2
  Bottom Layer w10: J2.3 577.17,1425.2 599.21,1403.15 v2(1000.79,1403.15) ; v2(1137.26,1403.79) 1188.69,1352.36 1269.29,1352.36 1296.9,1324.76 1296.9,1260.19 F4.92
VL53_SDA: F4.93 J2.2 | length 858.7
  Top Layer w10: v2(1000.39,1425.59) 1140.45,1425.59 1141.64,1424.41 v2(1142.13,1424.41)
  Bottom Layer w10: J2.2 608.66,1436.22 619.29,1425.59 v2(1000.39,1425.59) ; v2(1142.13,1424.41) 1190.94,1375.59 1279.13,1375.59 1316.58,1338.14 1316.58,1260.19 F4.93
pads on no net: CMPS12.2 ESP82.2 ESP82.3 ESP82.6 ESP82.7 F4.1 F4.2 F4.3 F4.4 F4.5 F4.6 F4.7 F4.8 F4.9 F4.15 F4.16 F4.17 F4.18 F4.29 F4.33 F4.34 F4.37 F4.38 F4.39 F4.40 F4.41 F4.42 F4.45 F4.46 F4.51 F4.52 F4.53 F4.54 F4.57 F4.58 F4.63 F4.64 F4.65 F4.66 F4.67 F4.68 F4.69 F4.70 F4.71 F4.77 F4.78 F4.79 F4.81 F4.82 F4.84 F4.85 F4.86 F4.87 F4.88 F4.89 F4.90 F4.91 F4.97 F4.98 J2.M RC.6 RC.7 RC.8 RC.10 RC.11 RC.12 RC.13 RC.14 RC.15 RC.16

## Polygon pours and split planes (outlines as drawn)
GND on Top Layer "NONET_L01_P004" (solid, remove dead copper, shelved, pour order 4): 827.56,10.63 827.56,727.56 731.5,727.56 565.75,893.31 565.75,1313.39 413.39,1313.39 305.51,1205.51 305.51,1202.36 299.61,1208.27 1.18,1208.27 -3.54,1212.99 -3.54,1617.72 1775.98,1617.72 1777.95,1615.75 1771.65,1609.45 1771.65,-0.79
12V on Top Layer "12V_L01_P003" (solid, pour order 3): 196.85,728.35 151.18,728.35 151.18,1100.39 87.01,1100.39 87.01,1131.89 11.81,1131.89 11.81,635.83 196.85,635.83
GND on Top Layer "GND_L01_P002" (solid, pour order 2): 687.01,685.04 797.24,685.04 797.24,574.8 797.24,230.32 603.54,230.32 603.54,399.61 722.44,399.61 734.25,411.42 734.25,531.5 730.32,531.5 675.2,586.61 501.97,586.61 454.72,539.37 454.72,486.22 501.97,438.98 501.97,17.72 484.25,0 -3.94,0 -3.94,602.36 214.57,602.36 417.32,602.36 417.32,669.29 442.91,694.88 539.37,694.88 539.37,887.8 366.14,1061.02 157.48,1061.02 157.48,1133.86 624.02,1133.86 637.8,1120.08 637.8,1078.74 629.92,1070.87 614.17,1070.87 590.55,1047.24 590.55,685.04
NetC26_1 on Top Layer "NETC26_1_L01_P001" (solid, pour order 1): 224.41,725.2 224.8,724.8 300.39,724.8 300.39,1033.46 375.59,1033.46 531.5,877.56 531.5,706.69 527.56,702.76 486.22,702.76 486.22,766.54 475.2,777.56 417.32,777.56 407.48,767.72 407.48,614.17 224.41,614.17
VBAT+ on Top Layer "VBAT+_L01_P000" (solid, pour order 0): 541.34,566.93 541.34,480.32 511.81,450.79 511.81,7.87 587.01,7.87 587.01,403.94 604.33,421.26 604.33,464.57 596.46,472.44 582.68,486.22 582.68,572.83 547.24,572.83
GND on Bottom Layer "NONET_L02_P005" (solid, remove dead copper, shelved, pour order 5): 0,1614.17 1771.65,1614.17 1771.65,0 0,0

## Keep-outs
Keep-Out Layer:
  circle w19.68: c285.43,1407.48 r78.74
  circle w19.68: c1486.22,1407.48 r78.74
  circle w19.68: c285.43,206.69 r78.74
  circle w19.68: c1486.22,206.69 r78.74
  lines w10: 0,0 1771.65,0 1771.65,1614.17 0,1614.17 0,0

## Silkscreen, mask and mechanical layers (free items; w line width, h text height)
Top Overlay:
  circle w10: c1486.22,206.69 r88.58
  circle w10: c1486.22,1407.48 r88.58
  circle w10: c285.43,1407.48 r88.58
  circle w10: c285.43,206.69 r88.58
  lines w10: 856.3,360.24 856.3,1305.12 1525.59,1305.12 1525.59,360.24 856.3,360.24
Bottom Overlay:
  circle w10: c1486.22,1407.48 r88.58
  circle w10: c285.43,1407.48 r88.58
  circle w10: c285.43,206.69 r88.58
  circle w10: c1486.22,206.69 r88.58
  lines w10: 818.9,285.43 818.9,836.61 1763.78,836.61 1763.78,285.43 818.9,285.43 ; 852.36,1013.78 1324.8,1013.78 1324.8,1604.33 852.36,1604.33 852.36,1013.78
Mechanical 1:
  lines w10: 0,807.09 0,0 885.83,0
Dimensions:
  lines w10: 285.43,807.09 885.83,807.09 ; 285.43,807.09 285.43,1407.48 885.83,1407.48 ; 285.43,807.09 285.43,206.69 885.83,206.69 ; 285.43,807.09 885.83,807.09 ; 885.83,206.69 1486.22,206.69 1486.22,807.09 ; 885.83,206.69 885.83,807.09 ; 885.83,206.69 885.83,807.09 ; 885.83,807.09 1486.22,807.09 ; 885.83,807.09 885.83,1407.48 ; 885.83,807.09 1486.22,807.09 ; 885.83,807.09 885.83,1407.48 ; 885.83,1407.48 1486.22,1407.48 1486.22,807.09